# EAGLE board cell (EAGLE 7.6.0)
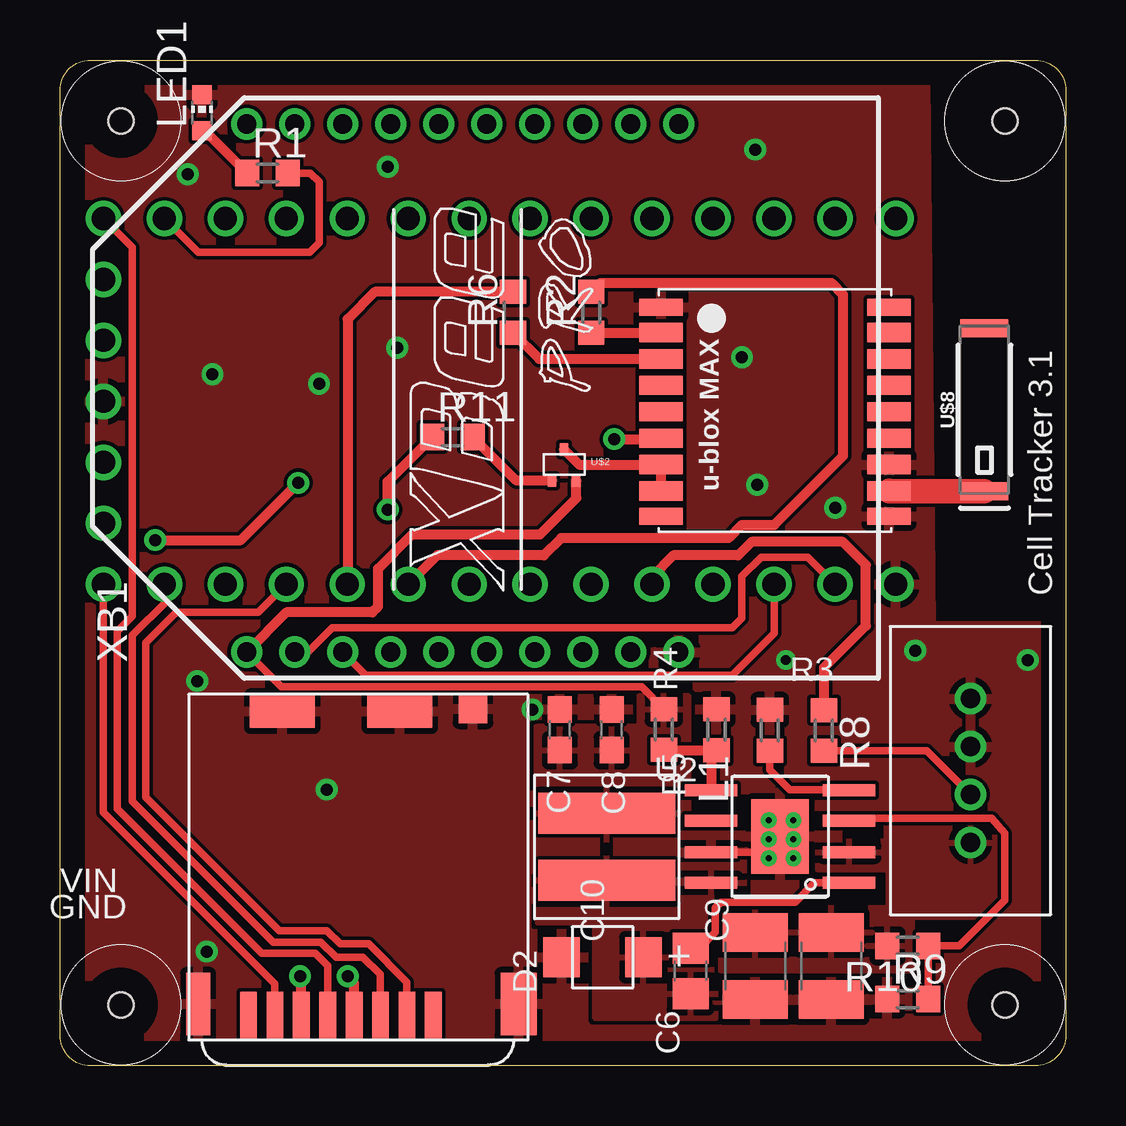
[diagram p0: board, top side]
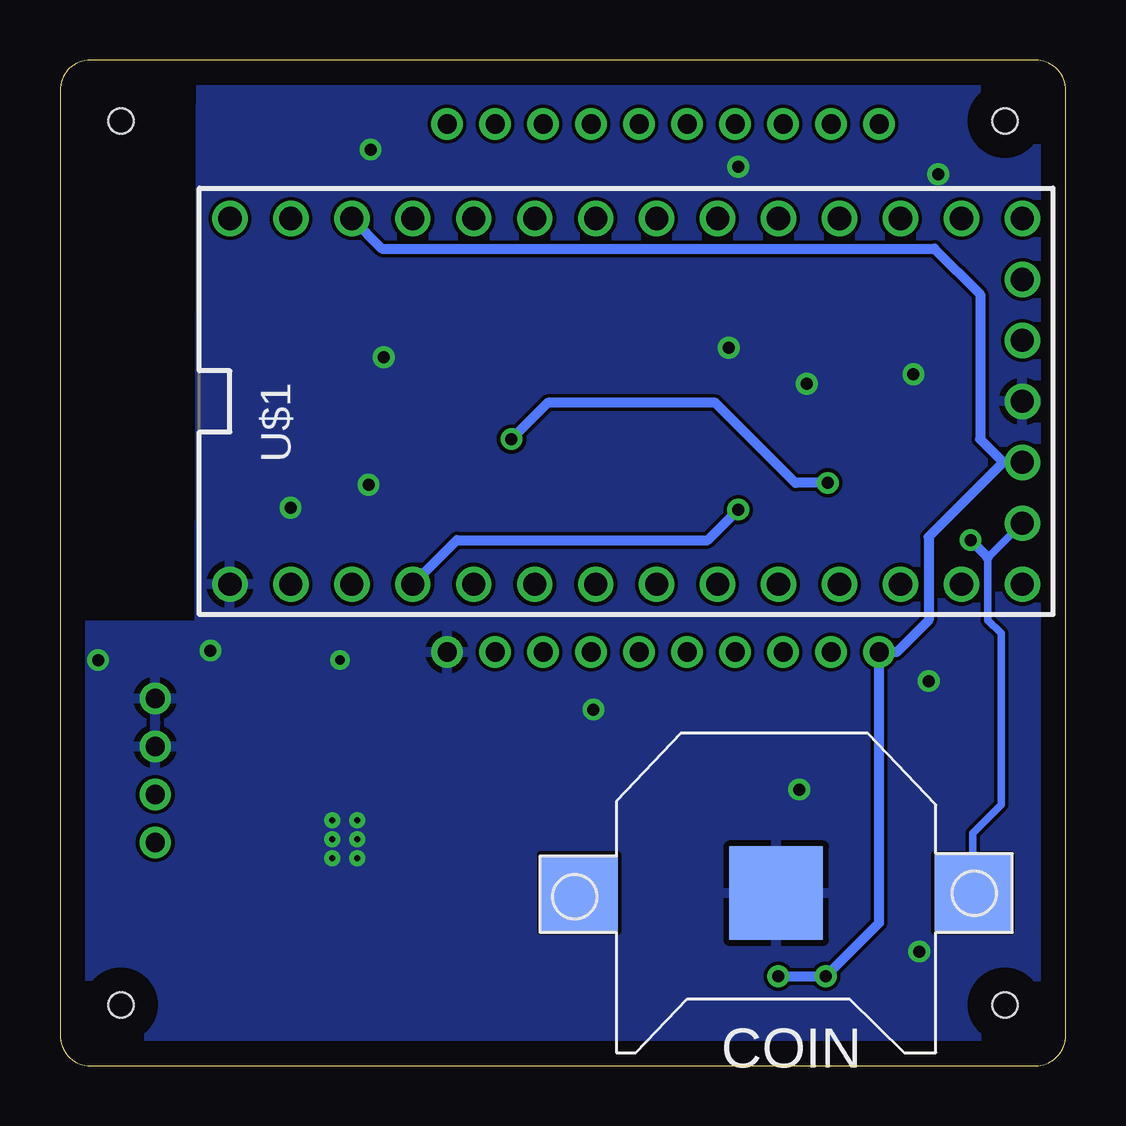
[diagram p1: board, bottom side, seen from below]

Size 41.91 x 41.91 mm. Coordinates in mm from the lower left corner, seen from the top.
Outline: 0,1.27 0,40.64 arc-90 1.27,41.91 40.64,41.91 arc-90 41.91,40.64 41.91,1.27 arc-90 40.64,0 1.27,0 arc-90 0,1.27
Copper layers (1*16): Top 0.035mm / dielectric 1.5mm / Bottom 0.035mm
Design rules "default": minimum track width 6mil, minimum drill 0.35mm, track to track 6mil, track to pad 6mil, pad to pad 6mil, via to via 6mil, smd to smd 6mil, copper to edge 40mil, drill to drill 6mil, minimum pad ring 10mil, minimum via ring 8mil, stop-mask expansion 4mil, vias tented up to drill 0mil, thermal gap 10mil
Holes 1.05 mm at 2.54,39.37 39.37,39.37 2.54,2.54 39.37,2.54

## Footprints (pad centres in the part's own frame; a part is rotated, then mirrored left to right if it is on the bottom)
C0805 = smd 1.3 x 1.5: 1 -0.95,0; 2 0.95,0
C0603 = smd 1.1 x 1: 1 -0.85,0; 2 0.85,0
C1210 = smd 1.6 x 2.7: 1 -1.4,0; 2 1.4,0
CR1220-SMD = smd 3.2 x 3.2: +$1 -8.2,0; +$2 8.2,0 | smd 3.9 x 3.9: - 0,0
DO-214AC = smd 1.524 x 1.676: P$1 -1.702,0; P$2 1.702,0
ABRACON = smd 1.7 x 5.7: P$1 1.4,0; P$2 -1.4,0
CHIP-LED0603 = smd 0.8 x 0.8: A 0,-0.75; C 0,0.75
R0603 = smd 1 x 1.1: 1 -0.85,0; 2 0.85,0
SO8 = smd 0.5 x 2.2: P$1 -1.92,-2.875; P$2 -0.65,-2.875; P$3 0.65,-2.875; P$4 1.92,-2.875; P$5 1.92,2.875; P$6 0.65,2.875; P$7 -0.65,2.875; P$8 -1.92,2.875 | smd 3.1 x 2.4: PAD 0,0
TEENSY_3.0-3.2&LC_OUTER_ROW = drill 0.965: 0 -7.62,13.97; 1 -7.62,11.43; 2 -7.62,8.89; 3 -7.62,6.35; 3.3V 7.62,11.43; 3.3V1 -2.54,-16.51; 4 -7.62,3.81; 5 -7.62,1.27; 6 -7.62,-1.27; 7 -7.62,-3.81; 8 -7.62,-6.35; 9 -7.62,-8.89; 10 -7.62,-11.43; 11 -7.62,-13.97; 12 -7.62,-16.51; 13 7.62,-16.51; 14/A0 7.62,-13.97; 15/A1 7.62,-11.43; 16/A2 7.62,-8.89; 17/A3 7.62,-6.35; 18/A4 7.62,-3.81; 19/A5 7.62,-1.27; 20/A6 7.62,1.27; 21/A7 7.62,3.81; 22/A8 7.62,6.35; 23/A9 7.62,8.89; AGND 7.62,13.97; GND -7.62,16.51; GND1 0,-16.51; PGM 2.54,-16.51; RESET/DAC 5.08,-16.51; VBAT -5.08,-16.51; VIN 7.62,16.51
SC-75 = smd 0.356 x 0.503: P$1 0.178,0.251; P$2 1.18,0.251; P$3 0.686,1.55
MICRO_SD_HINGED = smd 0.7 x 2: CD -1.1,-13.4; CLK -4.4,-13.4; CMD -2.2,-13.4; DAT0 -6.6,-13.4; DAT1 -7.7,-13.4; DAT2 0,-13.4; VDD -3.3,-13.4; VSS -5.5,-13.4 | smd 2.7 x 1.4: CD1 -1.4,-0.7; GND3 -6.3,-0.7 | smd 1.5 x 2.6: GND1 3.55,-12.9 | smd 1.2 x 1.2: GND2 1.65,-0.6 | smd 1 x 2.6: GND4 -9.8,-12.9
4_PIN_MICROCLASP = drill 0.8: P$1 -1,0; P$2 -3,0; P$3 1,0; P$4 3,0
MAX-M8 = smd 1.8 x 0.7: 1_GND 4.95,-4.4; 9_RESET_N 4.95,4.3; 10_GND -4.55,4.3; 18_SAFEBOOT_N -4.55,-4.4 | smd 1.8 x 0.8: 2_TXD 4.95,-3.35; 3_RXD 4.95,-2.25; 4_TIMEPULSE 4.95,-1.15; 5_EXTINT 4.95,-0.05; 6_V_BCKP 4.95,1.05; 7_VCC_IO 4.95,2.15; 8_VCC 4.95,3.25; 11_RF_IN -4.55,3.25; 12_GND -4.55,2.15; 13_LNA_EN -4.55,1.05; 14_VCC_RF -4.55,-0.05; 15_V_ANT/RESERVED -4.55,-1.15; 16_SDA -4.55,-2.25; 17_SCL -4.55,-3.35
SPARKFUN-GPS_ANT-GPS-2X7MM = smd 0.75 x 2: 1 -3.4,0; NC 3.4,0
XBEE-PRO = drill 0.8 pad 1.27: 1 -11,9; 2 -11,7; 3 -11,5; 4 -11,3; 5 -11,1; 6 -11,-1; 7 -11,-3; 8 -11,-5; 9 -11,-7; 10 -11,-9; 11 11,-9; 12 11,-7; 13 11,-5; 14 11,-3; 15 11,-1; 16 11,1; 17 11,3; 18 11,5; 19 11,7; 20 11,9

## Placement (x,y rotation side)
C6  47 uF  [C0805]  26.27,3.95 90 top
C7  .18 uF  [C0603]  20.83,14 90 top
C8  10 uF  [C0603]  22.99,14 90 top
C9  10 uF  [C1210]  32.13,4.16 270 top
C10  2.2 uF  [C1210]  28.97,4.16 270 top
COIN  CR1220SMD  [CR1220-SMD]  12.07,7.2 180 bottom
D2  DO-214AC  [DO-214AC]  22.61,4.52 0 top
L1  ASPI-6045S-560M-TCT-ND  [ABRACON]  22.78,9.13 270 top
LED1  Green  [CHIP-LED0603]  5.92,39.71 0 top
R1  470  [R0603]  8.65,37.2 0 top
R2  22  [R0603]  22.13,31.39 90 top
R3  23.3k  [R0603]  29.58,13.99 270 top
R4  45k  [R0603]  25.16,14.02 90 top
R5  13.3k  [R0603]  27.35,14 270 top
R6  22  [R0603]  18.87,31.39 90 top
R8  [R0603]  31.83,13.97 270 top
R9  39k  [R0603]  35.32,2.78 0 top
R10  195k  [R0603]  35.32,5 180 top
R11  100  [R0603]  16.35,26.19 0 top
U2  LMR16020  [SO8]  30,9.56 90 top
U$1  TEENSY_3.1-3.2_OUTER_ROW  [TEENSY_3.0-3.2&LC_OUTER_ROW]  18.32,27.69 90 bottom
U$2  SI1013  [SC-75]  20.32,24.13 0 top
U$3  MICRO_SD  [MICRO_SD_HINGED]  15.56,15.48 0 top
U$4  MICROCLASP_4  [4_PIN_MICROCLASP]  37.94,12.3 90 top
U$7  MAX-M8  [MAX-M8]  29.99,27.2 180 top
U$8  1.575GHz  [SPARKFUN-GPS_ANT-GPS-2X7MM]  38.52,27.34 90 top
XB1  XBEE-LTE-M  [XBEE-PRO]  16.78,28.24 90 top

## Library data of the parts
C6-C10 R1 R3-R5 R8-R10 = resistor
COIN = adafruit
D2 U2 = HASP
L1 = inductors
LED1 = led
R2 R6 R11 = rcl
U$1 = Teensy_3_and_LC_Series_Boards_v1.4
U$2 = cmdLibs
U$3 U$4 = NR_connectors
U$7 = ubloxLib
U$8 = Tracksoar v2 ; PROD_ID: ANT-09087; SF_ID: GPS-09131
XB1 = maxstream; MPN: XBP24-AWI-001; OC_FARNELL: 1337916; OC_NEWARK: 42M2667

## Nets
9_V_RESET_N: U$7.9_RESET_N
+3V3: C7.1 C8.1 L1.P$2 R4.2 U$1.3.3V U$1.3.3V1 U$2.P$2 U$3.VDD U$3.VSS XB1.1
AGND: U$1.AGND
EN: R9.2 R10.1 U2.P$3
FB: R4.1 R5.2 U2.P$5
GND: C7.2 C8.2 C9.2 C10.2 COIN.- D2.P$1 LED1.C R3.1 R5.1 R9.1 U2.P$7 U2.PAD U$1.GND U$1.GND1 U$3.CD1 U$3.GND1 U$3.GND2 U$3.GND3 U$3.GND4 U$4.P$3 U$4.P$4 U$7.1_GND U$7.10_GND U$7.12_GND XB1.10
GPSON: R11.1 U$1.2
MISO: U$1.12 U$3.DAT0
MOSI: U$1.11 U$3.CMD
N$1: U$7.11_RF_IN U$8.1
N$2: R1.2 U$1.14/A0
N$3: R6.1 U$7.3_RXD
N$4: R2.1 U$7.2_TXD
N$5: R11.2 U$2.P$1
N$6: U$1.VIN
N$8: R3.2 U2.P$4
N$9: C6.2 U2.P$1
N$10: LED1.A R1.1
N$11: U$2.P$3 U$7.7_VCC_IO U$7.8_VCC
N$12: R8.2 U$4.P$1
N$15: U$1.4
N$16: U$1.5
N$33: U$1.6
RX1: U$1.0 XB1.2
RX3: R2.2 U$1.7
SCK: U$1.13 U$3.CLK
SD_CS: U$1.9 U$3.CD
SW: C6.1 D2.P$2 L1.P$1 U2.P$8
SWITCH_LED: R8.1 U$1.3
TX1: U$1.1 XB1.3
TX3: R6.2 U$1.8
V_BCKP: COIN.+$1 U$1.VBAT U$7.6_V_BCKP
VIN: C9.1 C10.1 R10.2 U2.P$2 U$4.P$2

## Tracks (layer width: path | path; a pad name or v marks a point on that pad's centre or on a via)
+3V3  (via drill 0.5)
  Top 0.305: R4.2 24.23,15.8 9.22,15.8 XB1.1
  Top 0.406: U$2.P$2 21.51,23.65 20,22.15 14.68,22.15 13.26,20.72 13.26,19.13 13.02,18.89 9.43,18.89 XB1.1 | U$3.VSS 10.06,3.67 v10,3.73 | U$3.VDD 12.26,3.46 v11.99,3.73
  Bottom 0.406: U$1.3.3V 28.5,34.05 5.48,34.05 3.57,32.15 3.57,26.11 2.6,25.15 | 2.6,25.15 U$1.3.3V1 | 2.6,25.15 5.71,22.04 5.71,18.57 7.05,17.24 XB1.1 7.78,5.95 v10,3.73 v11.99,3.73
  pour Top: 26.19,15.4 24.13,15.4 24.13,14.13 19.84,14.13 19.84,9.45 26.19,9.45
EN
  Top 0.305: R9.2 R10.1 37.47,5 39.37,6.91 39.37,9.68 38.81,10.32 32.99,10.32 U2.P$3 32.91,10.24
FB
  Top 0.406: R4.1 25.18,13.15 R5.2 27.13,12.93 U2.P$5
GND  (via drill 0.25, 0.41, 0.5)
  Top 0.305: U2.P$7 29.27,8.91 v29.53,8.65
  other vias: 30.56,8.65 30.56,10.24 29.53,10.24 29.53,9.45 28.42,29.53 29.05,24.21 28.97,38.18 13.65,37.47 10.79,28.42 14.05,29.92 6.35,28.81 5.32,37.15 30.56,9.45 6.11,4.76 11.11,11.51 19.68,14.84 35.64,17.3 40.32,16.91 32.31,23.26 5.71,16.03 30.24,16.91
  pour Bottom (rank 6): -2.54,44.45 36.04,44.45 36.12,18.34 45.8,18.34 45.72,-2.54 -2.54,-2.54
  pour Top (rank 6): -1.27,43.18 36.04,43.18 36.27,18.34 44.69,18.34 44.45,-1.27 -1.27,-1.27
GPSON  (via drill 0.5)
  Top 0.406: 15.58,26.11 R11.1 13.65,24.34 v13.65,23.18
  Bottom 0.406: U$1.2 25.37,21.91 14.92,21.91 v13.65,23.18
MISO
  Top 0.305: U$3.DAT0 8.96,3.42 1.81,10.57 U$1.12
MOSI
  Top 0.305: U$1.11 4.45,19.97 4.45,19.37 3.02,17.94 3.02,11.03 8.89,5.16 10.87,5.16 11.51,4.52 12.62,4.52 13.34,3.81 13.34,2.1 U$3.CMD
N$1
  Top 1.016: U$7.11_RF_IN 34.55,23.94 U$8.1
N$2
  Top 0.305: R1.2 10.43,37.2 10.79,36.83 10.79,34.29 10.4,33.89 5.76,33.89 U$1.14/A0
N$3
  Top 0.406: R6.1 19.96,29.45 U$7.3_RXD
N$4
  Top 0.406: R2.1 22.14,30.55 U$7.2_TXD
N$5
  Top 0.406: 17.24,26.23 R11.2 19.01,24.38 U$2.P$1
N$8
  Top 0.305: R3.2 29.57,12.34 30.4,11.51 32.85,11.51 U2.P$4
N$9
  Top 0.305: C6.2 26.65,4.9 27.3,5.56 27.3,6.59 27.54,6.83 30.64,6.83 31.43,7.62 32.86,7.62 U2.P$1
N$10
  Top 0.406: LED1.A 6.04,38.96 R1.1
N$11
  Top 0.406: U$7.8_VCC U$7.7_VCC_IO | 24.83,25.27 U$7.7_VCC_IO | U$2.P$3 21.63,25.05 U$7.7_VCC_IO
N$12
  Top 0.305: R8.2 36.12,13.12 U$4.P$1
RX1
  Top 0.305: XB1.2 9.79,17.22 10.32,17.22 11.35,18.26 28.02,18.26 28.42,18.65 28.42,20.4 29.21,21.19 31.16,21.19 U$1.0
RX3
  Top 0.406: U$1.7 15.72,21.27 20.16,21.27 20.88,21.99 27.86,21.99 28.42,22.54 29.77,22.54 32.62,25.4 32.62,32.15 32.15,32.62 22.51,32.62 R2.2
SCK
  Top 0.305: U$1.13 3.02,34.1 3.02,18.73 2.38,18.1 2.38,10.72 8.41,4.68 10.64,4.68 11.16,4.16 U$3.CLK
SD_CS
  Top 0.305: U$1.9 8.26,18.89 4.84,18.89 3.57,17.62 3.57,11.19 9.13,5.64 11.11,5.64 11.67,5.08 12.86,5.08 14.46,3.48 U$3.CD
SW
  pour Top (rank 2): 19.92,8.65 28.5,8.65 28.5,6.75 27.3,6.75 27.3,4.05 27.3,1.98 22.3,1.98 22.3,5.95 19.92,5.95
SWITCH_LED
  Top 0.406: U$1.3 24.67,20.38 25.56,21.27 28.26,21.27 28.81,21.83 32.62,21.83 33.58,20.88 33.58,18.34 31.83,16.59 R8.1
TX1
  Top 0.305: U$1.1 29.77,20.05 29.77,18.02 28.02,16.27 12.75,16.27 XB1.3
TX3
  Top 0.406: R6.2 13.12,32.24 11.99,31.11 11.99,20.08 U$1.8
V_BCKP  (via drill 0.5)
  Top 0.406: v3.97,21.91 7.54,21.91 v9.92,24.29 | v23.1,26.11 25,26.11 U$7.6_V_BCKP
  Bottom 0.305: COIN.+$1 3.87,9.7 2.7,10.87 2.7,18.02 3.25,18.57 3.25,21.16 U$1.VBAT
  Bottom 0.406: 3.25,21.16 3.25,21.19 v3.97,21.91 | v9.92,24.29 11.27,24.29 14.61,27.62 21.59,27.62 v23.1,26.11
VIN
  pour Top: 31.59,9.37 34.45,9.37 34.45,10.08 41.35,10.08 41.35,6.19 35.48,6.19 35.48,3.97 27.54,3.97 27.54,6.59 34.53,6.59 34.53,8.18 31.59,8.18

## Text on the board
tPlace: Cell Tracker 3.1 | VIN | GND